# Altium PCB Single LED.PcbDoc
Units mil, origin at the board's own origin, x right, y up, seen from the top; angles counter-clockwise.
Board outline 600 x 100 mil, 2 copper layers (Top Layer, Bottom Layer); 4 components, 3 nets, 6 pads, 1 vias.
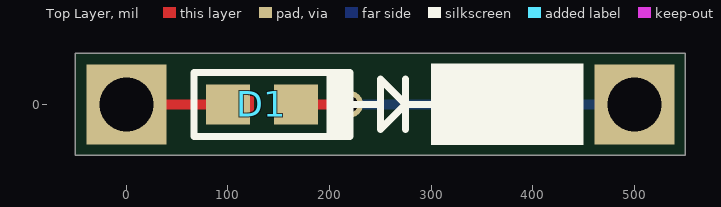
[diagram p0: Top Layer view]
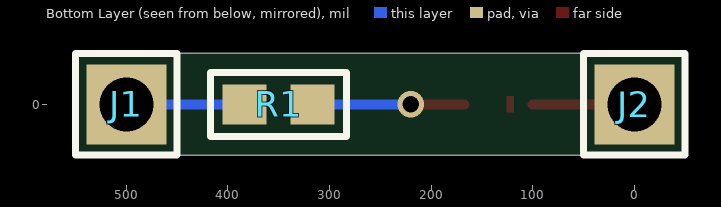
[diagram p1: Bottom Layer view, seen from below]

## Layer stack, top to bottom
Top Solder: solder mask 0.4, Solder Resist, Dk 3.5
Top Layer: signal copper 1.4
Dielectric 1: dielectric 12.6, FR-4, Dk 4.8
Bottom Layer: signal copper 1.4
Bottom Solder: solder mask 0.4, Solder Resist, Dk 3.5

## Board outline
-50,-50 -50,50 550,50 550,-50

## Design rules (kind name [scope] priority, off if disabled: settings)
Clearance [All] p1: gap=6 ignorepadtopadclearanceinfootprint=FALSE
Creepage [All] p1: checkdistance=10 applytopolygonpour=TRUE
MinimumAnnularRing [All] p1: minimumring=5
PolygonConnect [All] p1: connectstyle=Relief reliefconductorwidth=10 reliefentries=4 polygonreliefangle="45 Angle" airgapwidth=10
ReturnPath [All] p1: _gaplimit=0
RoutingVias [All] p1: holewidth=16 width=26 viastyle="Through Hole" minholewidth=16 minwidth=26 maxholewidth=16 maxwidth=26
SMDEntry [All] p1: side=TRUE corner=TRUE anyangle=FALSE
SilkToSolderMaskClearance [IsPad] p1: minsilkscreentomaskgap=6 clearancetoexposedcopper=TRUE
SolderMaskExpansion [All] p1: expansion=4 istentingtop=FALSE
UnConnectedPin [All] p1:
UnRoutedNet [All] p1: checkbadconnections=TRUE
Width [All] p1: maxlimit=10 minlimit=6 preferedwidth=6
28 further rules are at their usual default settings.

## Classes and differential pairs
component class "Single LED": D1 R1
component class "Block Diagram": J1 J2

## Components (designator, comment, footprint, x,y, rotation, side; value= is the part's Value field where it differs from the comment)
D1 "LED Green 0603 Signal 571nm" "0603 LED GREEN" 133.46,0 r180 top
J1 "Connector Breadboard 1-Pin" "CONNECTOR SAMTEC HW SERIES 1-PIN" 499.99,0 r180 bottom
J2 "Connector Breadboard 1-Pin" "CONNECTOR SAMTEC HW SERIES 1-PIN" -0.01,0 r180 bottom
R1 "Resistor 130R 0603 1%" "0603 RESISTOR" 350,0 r0 bottom

## Footprints (in the part's own frame and the unit in brackets; to place one, negate y for a bottom-side part, rotate by r counter-clockwise, add the part's x,y. Pads: shape width x height; smd on the part's side, far side on the other; paste and mask are expansions set on the pad)
"0603 LED GREEN" [mm]
  rect 1.1x1 smd mask+0.1: 1(-0.85,0) 2(0.85,0)
  Top Layer region: 0.203,-0.203 0.203,0.203 0.381,0.203 0.381,-0.203
  silkscreen extent -2.2,-0.8 1.7,0.8, body extent -0.85,-0.45 0.85,0.45, height 0.9
"0603 RESISTOR" [mm]
  rrect0% 1.1x1 smd mask+0.1: 1(-0.85,0) 2(0.85,0)
  silkscreen extent -1.7,-0.8 1.7,0.8, body extent -0.81,-0.41 0.79,0.39, height 0.3
"CONNECTOR SAMTEC HW SERIES 1-PIN" [mm]
  rect 2x2 hole 1.35: 1(0,0)
  silkscreen extent -1.27,-1.27 1.27,1.27, body extent -1.27,-1.27 1.27,1.27, height 11.82

## Part data
D1: Current Rating=30mA, Manufacturer="Lite-On Inc.", Manufacturer Part Number=LTST-C191KGKT, Max Operating Temperature=85ºC, Min Operating Temperature=-55ºC, Package=0603, ComponentLink1Description="Spec Sheet", Process Type=SMT, Wavelength=571nm
J1 J2: Manufacturer=Samtec, Manufacturer Part Number=HW-01-08-G-S-200-265, Max Operating Temperature=125ºC, Min Operating Temperature=-55ºC, Process Type=THT
R1: "Template", Manufacturer=Yageo, Manufacturer Part Number=RC0603FR-07130RL, Max Operating Temperature=155ºC, Min Operating Temperature=-55ºC, Package=0603, Power Rating=100mW, Resistance=130R, Tolerance=1%, Voltage Rating=75V, ComponentLink1Description="Data Sheet", Process Type=SMT

## Via types
v1: diameter 26, hole 16, Top Layer to Bottom Layer, tented top, 1 vias

## Nets (pads, with @x,y where several pads share a name; then routed paths per layer and width w, separated by ;. In a path a pad name is that pad's centre, name@x,y a point inside that pad or via, vN(x,y) a via of type N, cw(c..) or ccw(c..) an arc to the next point about the centre after c; other vN are vias at no path point)
Ground: D1.2 J2.1 | length 100
  Top Layer w9.84: J2.1 78.34,0 D1.2
NetD1_1: D1.1 R1.1 | length 149.6
  Top Layer w9.84: D1.1 v1(220,0)
  Bottom Layer w9.84: v1(220,0) R1.1
NetJ1_1: J1.1 R1.2 | length 116.5
  Bottom Layer w9.84: R1.2 J1.1

## Silkscreen, mask and mechanical layers (free items; w line width, h text height)
Top Overlay:
  rectangle: 300,-40 450,40
  lines w6.89: 220.08,0 250,0 ; 275,-25 275,25 ; 300,0 275,0 ; 275,0 250,25 250,-25 275,0
Board Shape:
  the board outline again, w3.94
Top Assembly:
  text "'.Layer_Name' / Assembly Drawing For '.VariantName'  Rev '.VersionPCBA'" at -50,50 h21.65
Bottom Assembly:
  text "'.Layer_Name' / Assembly Drawing For '.VariantName'  Rev '.VersionPCBA'" at 550,50 h21.65

## Dimensions
550,50 to 550,-50 on Board Shape
-50,50 to 550,50 on Board Shape